# Altium PCB ESP32_AC_Controller.PcbDoc
Units mm, origin at the board's own origin, x right, y up, seen from the top; angles counter-clockwise.
Board outline 70 x 70 mm, 2 copper layers (Top Layer, Bottom Layer); 68 components, 49 nets, 227 pads, 37 vias.
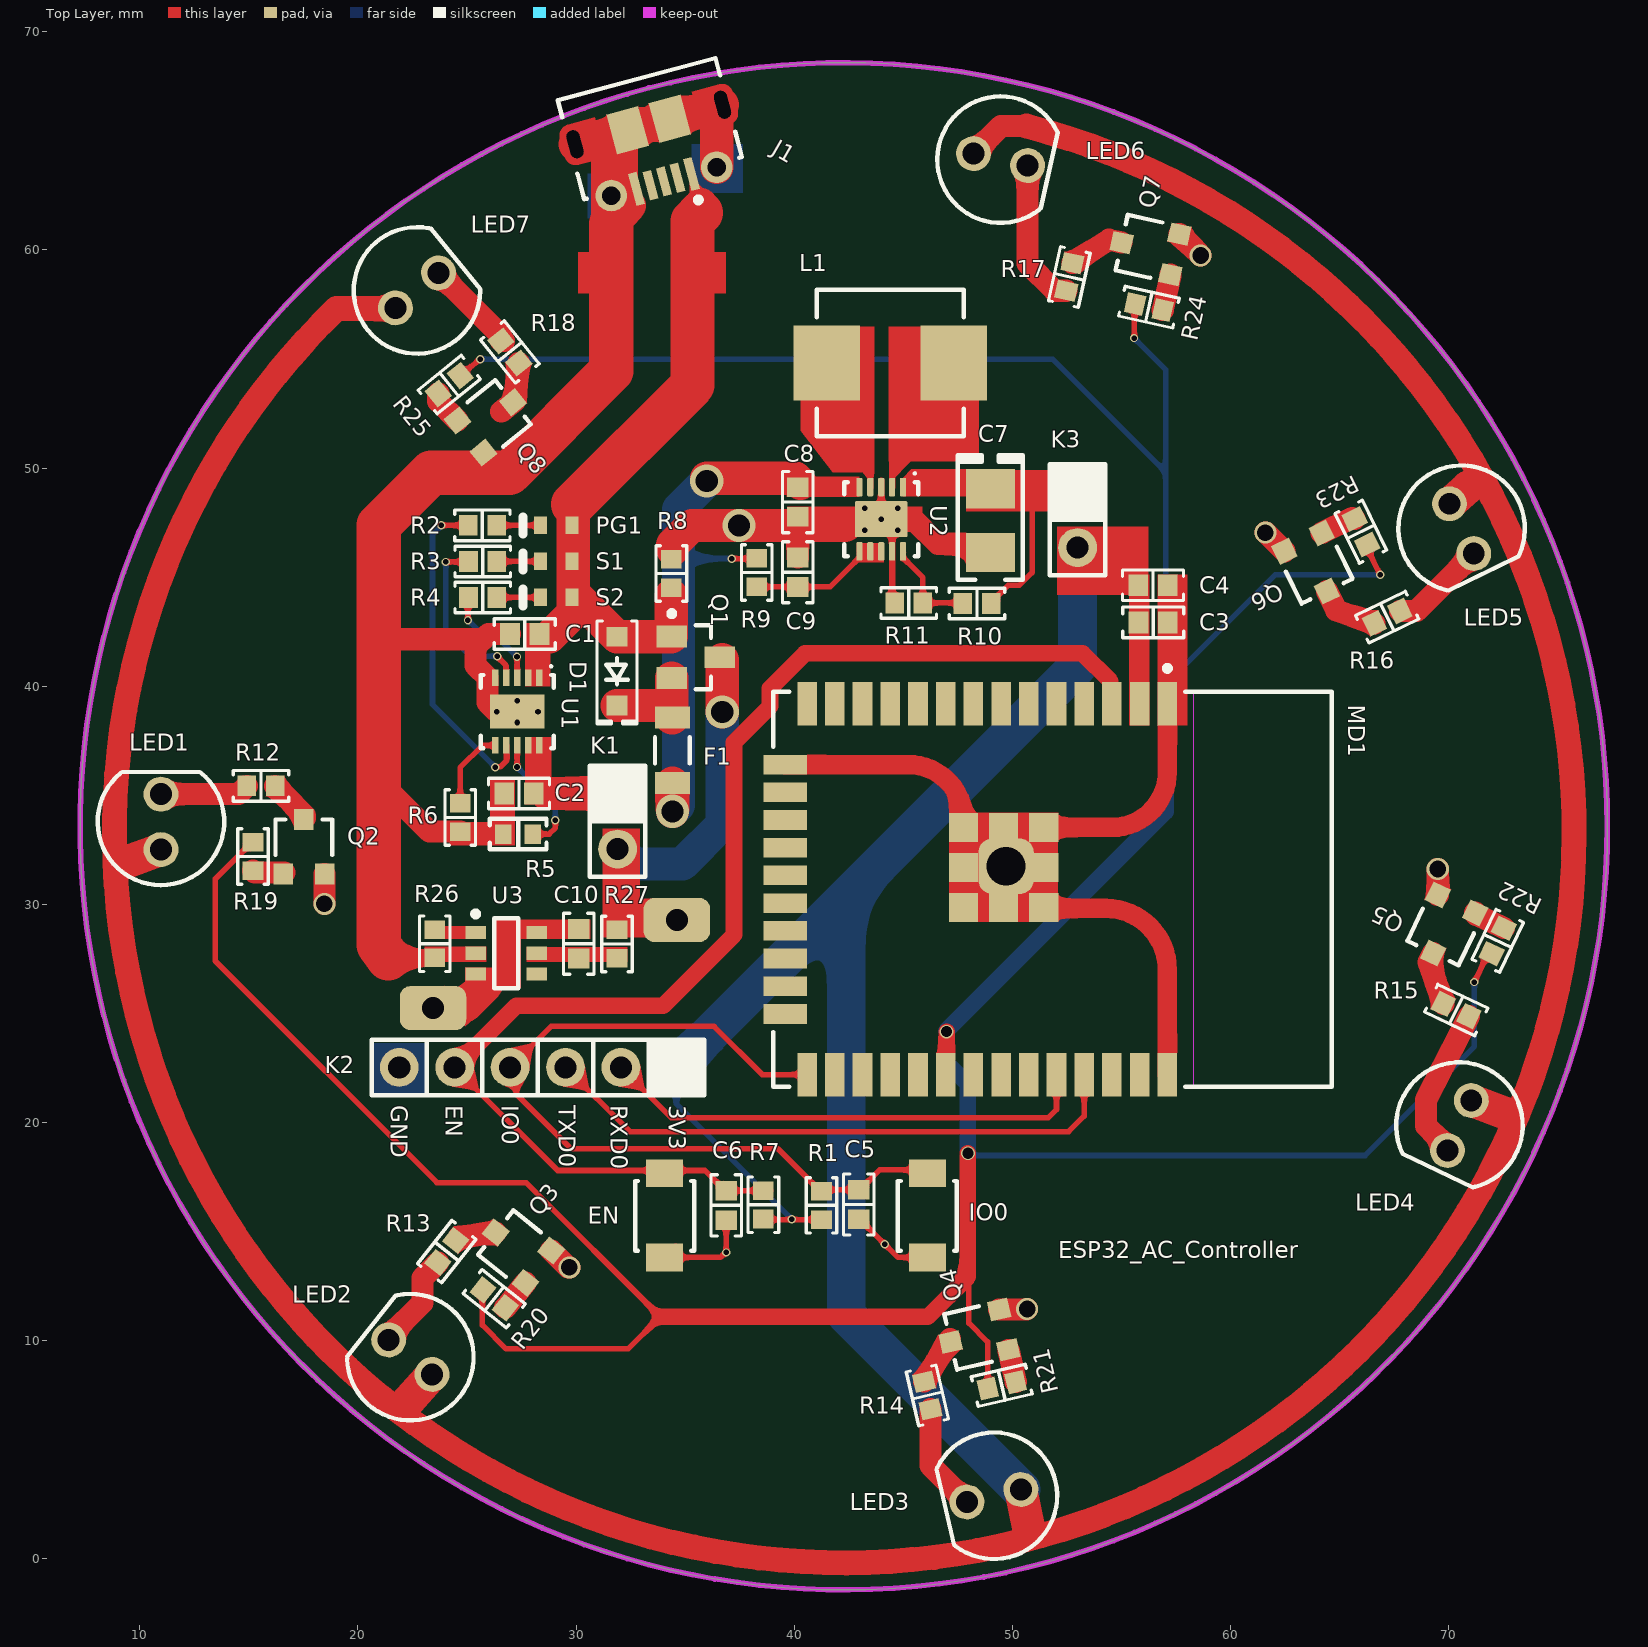
[diagram p0: Top Layer view]
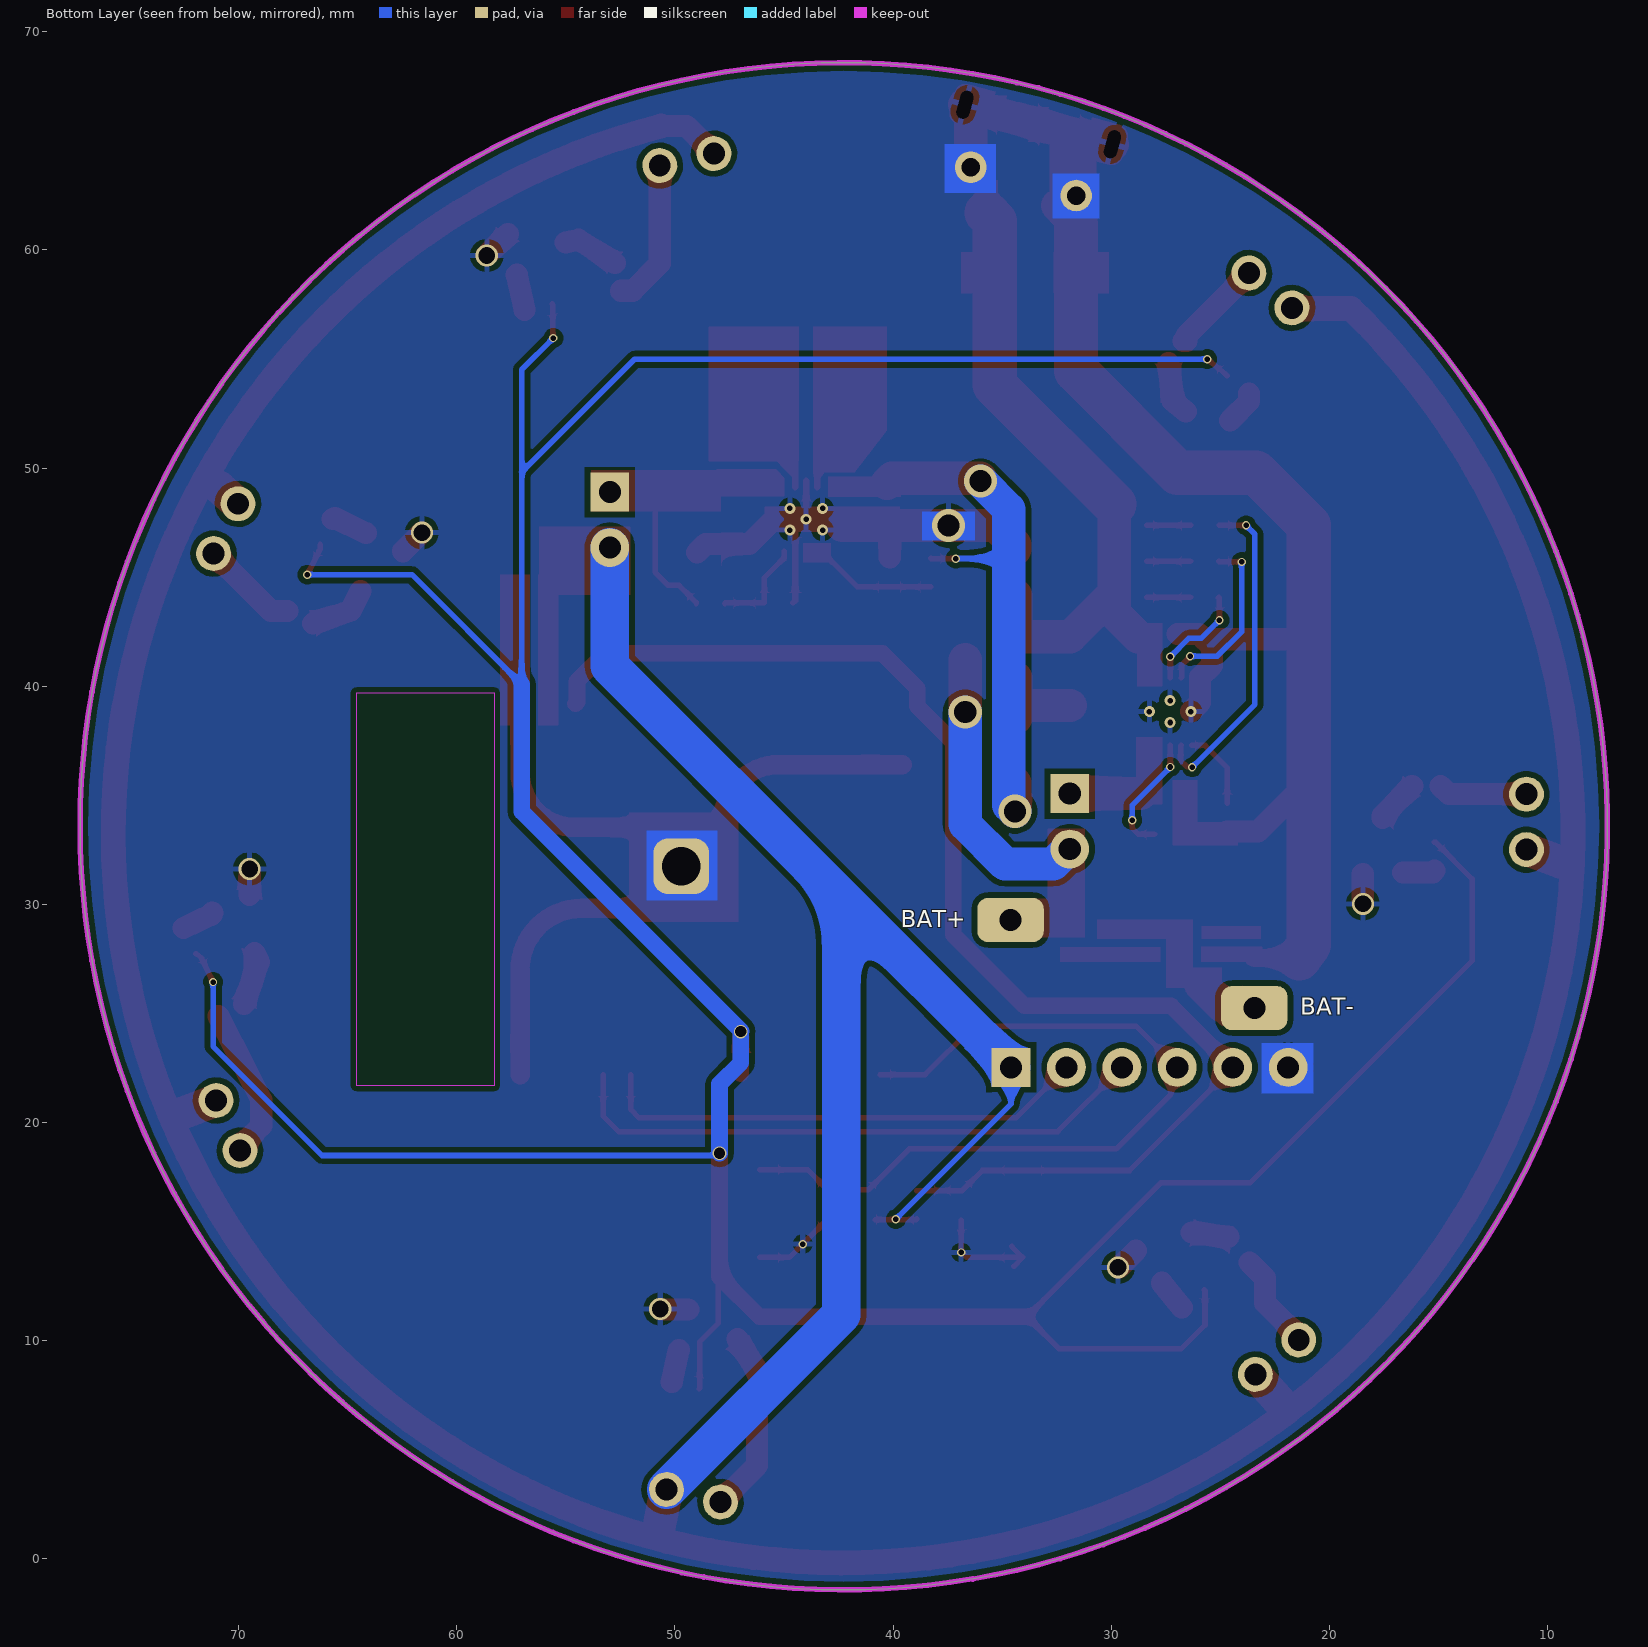
[diagram p1: Bottom Layer view, seen from below]
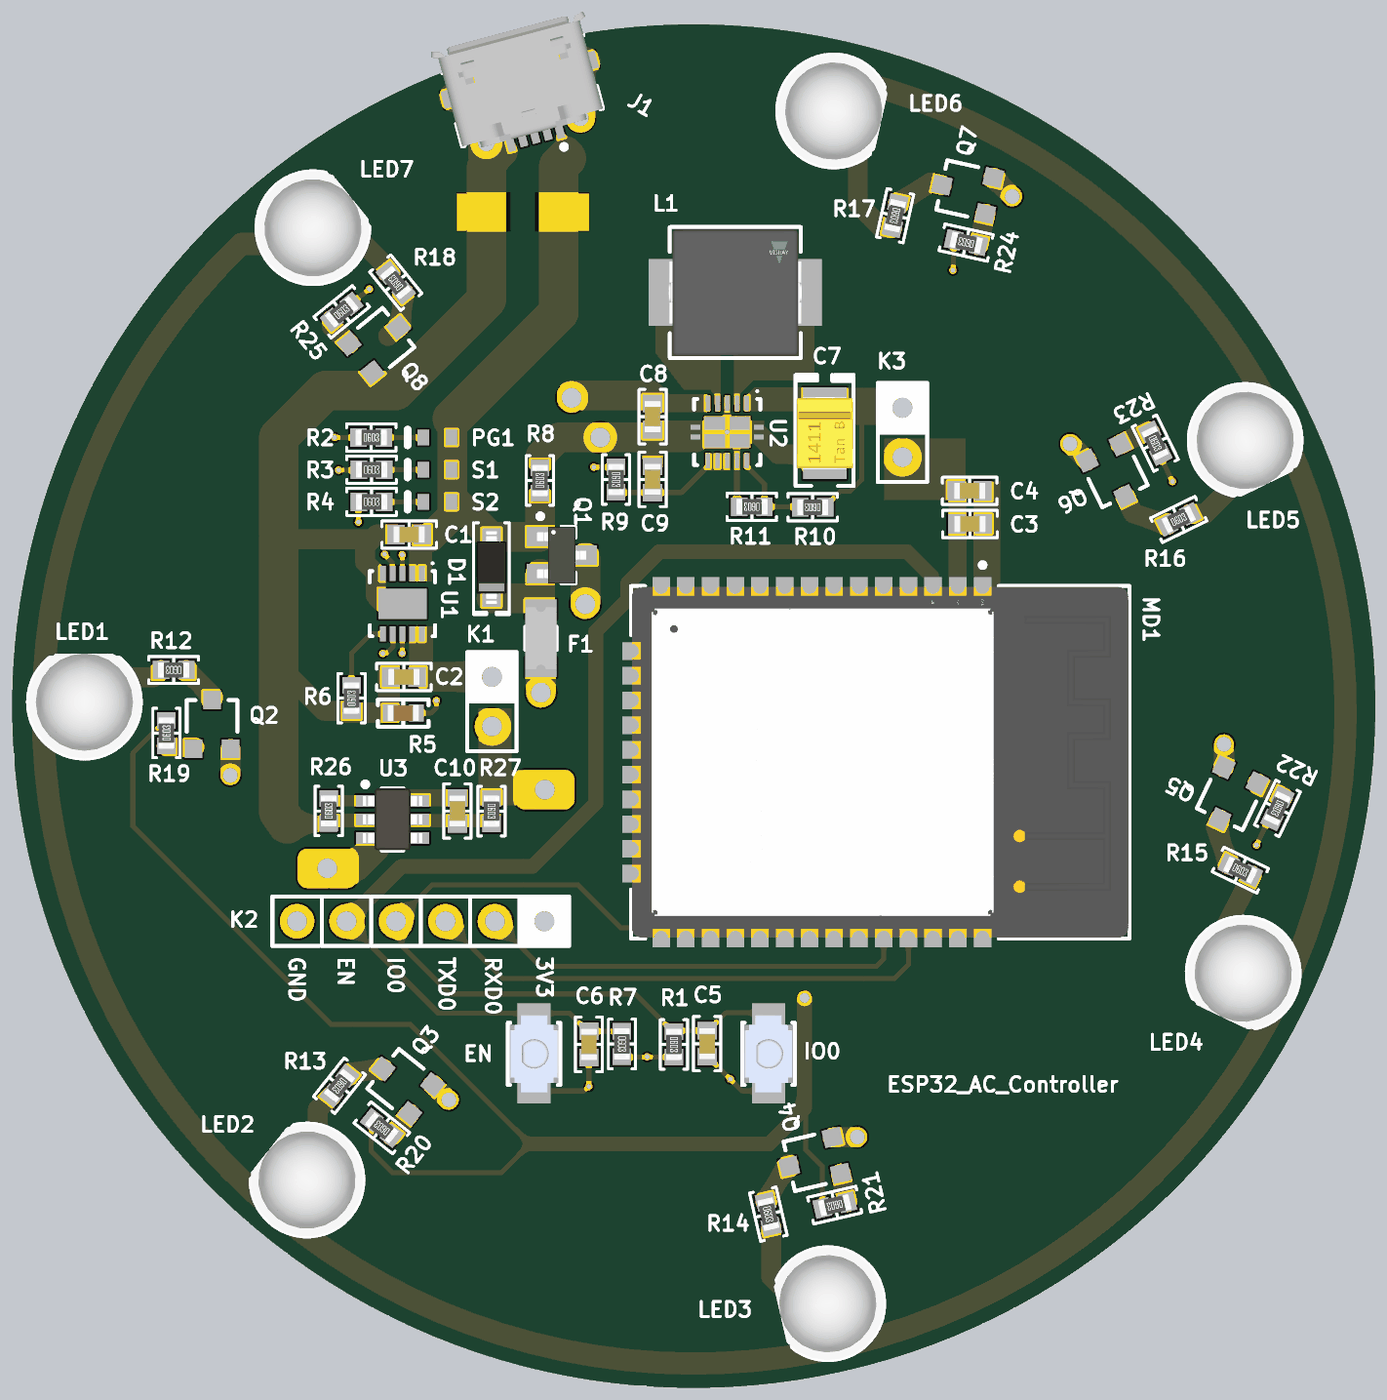
[diagram p2: 3D render of the assembled board from above, using the file's embedded part models]

## Layer stack, top to bottom
Top Solder: solder mask 0.0102, Solder Resist, Dk 3.5
Top Layer: signal copper 0.0356
Dielectric 1: dielectric 0.32, FR-4, Dk 4.8
Bottom Layer: signal copper 0.0356
Bottom Solder: solder mask 0.0102, Solder Resist, Dk 3.5

## Board outline
7.266,33.579 ccw(c42.266,33.579) 42.266,-1.421 ccw(c42.266,33.579) 77.266,33.579 ccw(c42.266,33.579) 42.266,68.579 ccw(c42.266,33.579)

## Design rules (kind name [scope] priority, off if disabled: settings)
Clearance InPolygon [InPolygon] p1: gap=0.254 ignorepadtopadclearanceinfootprint=FALSE
Clearance [All] p2: gap=0.178 ignorepadtopadclearanceinfootprint=FALSE
PolygonConnect [All] p1: connectstyle=Relief reliefconductorwidth=0.254 reliefentries=4 polygonreliefangle="90 Angle" airgapwidth=0.254
RoutingVias [All] p1: holewidth=0.254 width=0.381 viastyle="Through Hole" minholewidth=0.203 minwidth=0.254 maxholewidth=1.524 maxwidth=2.032
SolderMaskExpansion [All] p1: expansion=0.102 istentingtop=FALSE
Width [All] p1: maxlimit=2.032 minlimit=0.254 preferedwidth=0.254
30 further rules are at their usual default settings.

## Components (designator, comment, footprint, x,y, rotation, side; value= is the part's Value field where it differs from the comment)
C1 "4.7µF" "CAP 0603_1608" 27.646,42.393 r0 top
C2 "4.7µF" "CAP 0603_1608" 27.381,35.077 r0 top
C3 "0.1µF" "CAP 0603_1608" 56.45,42.926 r180 top
C4 "10µF" "CAP 0603_1608" 56.439,44.628 r0 top
C5 "0.1µF" "CAP 0603_1608" 42.951,16.245 r270 top
C6 "1µF" "CAP 0603_1608" 36.881,16.205 r90 top
C7 "33µF" "CAP POL 1411_3528" 48.997,47.586 r270 top
C8 "10µF" "CAP 0603_1608" 40.157,48.438 r90 top
C9 "0.1µF" "CAP 0603_1608" 40.157,45.223 r90 top
C10 "0.1µF" "CAP 0603_1608" 30.124,28.194 r270 top
D1 "B5817W" SOD-123 31.877,40.691 r270 top
EN "B3U-1000P" FP-B3U-1000P-MFG 34.061,15.723 r90 top (schematic designator SW2)
F1 "MF-NSMF150-2" BOUR-MF-NSMF150-2_V 34.417,37.059 r270 top
IO0 "B3U-1000P" FP-B3U-1000P-MFG 46.101,15.723 r90 top (schematic designator SW1)
J1 "105017-0001" USB-MICRO-B_V 33.68,64.44 r195 top
K1 "HEADER-1X2" HEADER-1X2 31.902,35.077 r0 top
K2 "HEADER-1X6" HEADER-1X6 34.595,22.53 r270 top
K3 "HEADER-1X2" HEADER-1X2 52.984,48.895 r0 top
L1 "2.2µH" FP-IHLP-2525CZ-FP_2_413x3-MFG 44.399,54.813 r0 top
LED1 "IR LED" "Type 5mm" 10.973,33.782 r90 top
LED2 "IR LED" "Type 5mm" 22.403,9.246 r141.5 top
LED3 "IR LED" "Type 5mm" 49.149,2.896 r193 top
LED4 "IR LED" "Type 5mm" 70.485,19.863 r244.5 top
LED5 "IR LED" "Type 5mm" 70.587,47.219 r296 top
LED6 "IR LED" "Type 5mm" 49.454,64.135 r347.5 top
LED7 "IR LED" "Type 5mm" 22.708,58.141 r39 top
MD1 "ESP32-WROOM-32" FP-ESP32-WROOM-32-MFG 51.839,30.692 r270 top
PG1 "TLMS1100-GS08" VISH-TLMX1100_V 29.097,47.371 r180 top
Q1 "CJ3401" FAIR-SSOT3L-3_V 35.484,41.326 r0 top
Q2 "2N7002" STM-SOT-23-3_V 17.526,32.639 r0 top
Q3 "2N7002" STM-SOT-23-3_V 27.291,14.178 r51.5 top
Q4 "2N7002" STM-SOT-23-3_V 48.386,10.225 r103 top
Q5 "2N7002" STM-SOT-23-3_V 69.814,28.897 r154.5 top
Q6 "2N7002" STM-SOT-23-3_V 63.867,45.478 r206 top
Q7 "2N7002" STM-SOT-23-3_V 56.226,60.063 r77.5 top
Q8 "2N7002" STM-SOT-23-3_V 26.132,52.229 r309 top
R1 "10 kOhms" "RES 0603_1608" 41.25,16.205 r270 top
R2 "1 kOhms" "RES 0603_1608" 25.705,47.371 r0 top
R3 "1 kOhms" "RES 0603_1608" 25.72,45.72 r0 top
R4 "1 kOhms" "RES 0603_1608" 25.72,44.069 r0 top
R5 "10 kOhms" "PTC 0603_1608" 27.345,33.223 r0 top value="470 Ohms"
R6 "1 kOhms" "RES 0603_1608" 24.689,33.985 r90 top
R7 "10 kOhms" "RES 0603_1608" 38.583,16.231 r270 top
R8 "10 kOhms" "RES 0603_1608" 34.366,45.161 r90 top
R9 "100 Ohms" "RES 0603_1608" 38.278,45.212 r270 top
R10 "1 MOhms" "RES 0603_1608" 48.377,43.79 r180 top
R11 "178 kOhms" "RES 0603_1608" 45.248,43.815 r180 top
R12 "62 Ohms" "RES 0603_1608" 15.555,35.433 r180 top
R13 "62 Ohms" "RES 0603_1608" 24.073,14.09 r231.5 top
R14 "62 Ohms" "RES 0603_1608" 46.097,7.492 r283 top
R15 "62 Ohms" "RES 0603_1608" 70.338,25.158 r334.5 top
R16 "62 Ohms" "RES 0603_1608" 67.172,43.162 r26 top
R17 "62 Ohms" "RES 0603_1608" 52.606,58.758 r257.5 top
R18 "62 Ohms" "RES 0603_1608" 26.963,55.32 r129 top
R19 "220 Ohms" "RES 0603_1608" 15.189,32.197 r90 top
R20 "220 Ohms" "RES 0603_1608" 26.246,11.926 r141.5 top
R21 "220 Ohms" "RES 0603_1608" 49.509,7.956 r193 top
R22 "220 Ohms" "RES 0603_1608" 72.245,28.329 r244.5 top
R23 "220 Ohms" "RES 0603_1608" 65.968,47.079 r296 top
R24 "220 Ohms" "RES 0603_1608" 56.255,57.377 r167.5 top
R25 "220 Ohms" "RES 0603_1608" 24.187,53.824 r39 top
R26 "1 kOhms" "RES 0603_1608" 23.52,28.194 r90 top
R27 "100 Ohms" "RES 0603_1608" 31.877,28.184 r270 top
S1 "TLMS1100-GS08" VISH-TLMX1100_V 29.097,45.72 r180 top
S2 "TLMS1100-GS08" VISH-TLMX1100_V 29.097,44.069 r180 top
U1 "MCP73833T-AMI/MF" DFN-MF10 27.305,38.837 r270 top
U2 "TPS63000DRCR" DRC0010J_V 43.985,47.652 r270 top
U3 "DW07D" DW07D 26.797,27.762 r0 top

## Footprints (in the part's own frame and the unit in brackets; to place one, negate y for a bottom-side part, rotate by r counter-clockwise, add the part's x,y. Pads: shape width x height; smd on the part's side, far side on the other; paste and mask are expansions set on the pad)
BOUR-MF-NSMF150-2_V [mm] "SMD, 2-Leads, Body 3.2x1.6mm"
  rect 1x1.6 smd: 1(-1.5,0) 2(1.5,0)
  silkscreen extent -0.6,-0.8 0.6,0.8, body extent -1.6,-0.8 1.6,0.8, height 0.55
"CAP 0603_1608" [mm] "Chip Capacitor, 2-Leads, Body 1.60x0.80mm, IPC Medium Density"
  rect 0.9x1 smd: 1(-0.675,0) 2(0.675,0)
  silkscreen extent -1.4,-0.7 1.4,0.7, body extent -0.8,-0.41 0.8,0.41, height 0.82
"CAP POL 1411_3528" [mm] "Molded Capacitor, 2-Leads, Body 3.50x2.80mm, IPC Medium Density"
  rect 1.8x2.23 smd: 1(-1.46,0) 2(1.46,0)
  silkscreen extent -3,-1.5 2.71,1.48, body extent -1.87,-1.45 1.86,1.45, height 2
DFN-MF10 [mm] "SON, 10-Leads, Body 3x3mm, Pitch 0.5mm, Microchip Recommended"
  rect 0.762x0.3 smd: 1(-1.55,1) 2(-1.55,0.5) 3(-1.55,0) 4(-1.55,-0.5) 5(-1.55,-1) 6(1.55,-1) 7(1.55,-0.5) 8(1.55,0) 9(1.55,0.5) 10(1.55,1)
  rect 1.55x2.48 smd: 11(0,0)
  silkscreen extent -2.12,-1.68 1.67,1.68, body extent -1.52,-1.52 1.52,1.52, height 1
DRC0010J_V [mm] "SON, 10-Leads, Body 3x3mm, Pitch 0.5mm, Thermal Pad 2.4x1.65mm, TI Recommended"
  rrect36% 0.85x0.28 smd paste-0.025 mask+0.07: 1(-1.475,1) 2(-1.475,0.5) 3(-1.475,0) 4(-1.475,-0.5) 5(-1.475,-1) 6(1.475,-1) 7(1.475,-0.5) 8(1.475,0) 9(1.475,0.5) 10(1.475,1)
  rrect6% 1.65x2.4 smd paste-0.825 mask+0.07: 11(0,0)
  Top Layer region: -0.39,1.2 -0.11,1.2 -0.11,1.9 -0.39,1.9
  Top Layer region: 0.39,1.9 0.11,1.9 0.11,1.2 0.39,1.2
  Top Layer region: 0.39,-1.2 0.11,-1.2 0.11,-1.9 0.39,-1.9
  Top Layer region: -0.39,-1.9 -0.11,-1.9 -0.11,-1.2 -0.39,-1.2
  silkscreen extent -2.15,-1.7 1.7,1.7, body extent -1.55,-1.55 1.55,1.55, height 1
DW07D [mm] "SOT23, 6-Leads, Body 2.92x2.80mm, Pitch 0.95mm, IPC Medium Density"
  rect 0.95x0.6 smd: 1(-1.4,0.95) 2(-1.4,0) 3(-1.4,-0.95) 4(1.4,-0.95) 5(1.4,0) 6(1.4,0.95)
  silkscreen extent -1.52,-1.6 0.55,1.92, body extent -1.53,-1.59 1.53,1.59, height 1.35
FAIR-SSOT3L-3_V [mm] "SOT23, 3-Leads, Body 2.92x1.4mm, Pitch 0.95mm"
  rect 1.4x1 smd: 1(-1.1,0.95) 2(-1.1,-0.95) 3(1.1,0)
  silkscreen extent -1.22,-1.46 0.7,2.12, body extent -1.26,-1.46 1.26,1.46, height 1.12
FP-B3U-1000P-MFG [mm]
  rect 1.27x1.7 smd paste+0 mask+0: 1(-1.905,0) 2(1.956,0)
  silkscreen extent -1.6,-1.35 1.6,1.35, body extent -2.2,-1.45 2.2,1.45, height 0.25
FP-ESP32-WROOM-32-MFG [mm]
  rect 2x0.9 smd paste+0 mask+0: 1(-8.5,5.26) 2(-8.5,3.99) 3(-8.5,2.72) 4(-8.5,1.45) 5(-8.5,0.18) 6(-8.5,-1.09) 7(-8.5,-2.36) 8(-8.5,-3.63) 9(-8.5,-4.9) 10(-8.5,-6.17) 11(-8.5,-7.44) 12(-8.5,-8.71) 13(-8.5,-9.98) 14(-8.5,-11.25) 25(8.5,-11.25) 26(8.5,-9.98) 27(8.5,-8.71) 28(8.5,-7.44) 29(8.5,-6.17) 30(8.5,-4.9) 31(8.5,-3.63) 32(8.5,-2.36) 33(8.5,-1.09) 34(8.5,0.18) 35(8.5,1.45) 36(8.5,2.72) 37(8.5,3.99) 38(8.5,5.26)
  rect 0.9x2 smd paste+0 mask+0: 15(-5.715,-12.25) 16(-4.445,-12.25) 17(-3.175,-12.25) 18(-1.905,-12.25) 19(-0.635,-12.25) 20(0.635,-12.25) 21(1.905,-12.25) 22(3.175,-12.25) 23(4.445,-12.25) 24(5.715,-12.25)
  rect 1.33x1.33 smd paste+0 mask+0: 39(-2.835,-0.405) 39(-2.835,-2.24) 39(-2.835,-4.075) 39(-1,-0.405) 39(-1,-2.24) 39(-1,-4.075) 39(0.835,-0.405) 39(0.835,-2.24) 39(0.835,-4.075)
  Keep-Out Layer region: -9,6.45 9,6.45 9,12.75 -9,12.75
  Keep-Out Layer region: -9,6.45 9,6.45 9,12.75 -9,12.75
  silkscreen extent -10.25,-12.8 9.05,12.8, body extent -9.6,-13.35 9.6,12.9, height 0.25
FP-IHLP-2525CZ-FP_2_413x3-MFG [mil]
  rect 120x135 smd paste+0 mask+0: 1(-115,0) 2(115,0)
  silkscreen extent -132,-132 132,132, body extent -166,-136 166,136, height 10
HEADER-1X2 [mil]
  rect 70x70 hole 40: 1(0,0)
  round 70 hole 40: 2(0,-100)
  silkscreen extent -50,-150 50,50, body extent -50,-150 50,50, height 470
HEADER-1X6 [mil]
  rect 70x70 hole 40: 1(0,0)
  round 70 hole 40: 2(0,-100) 3(0,-200) 4(0,-300) 5(0,-400) 6(0,-500)
  silkscreen extent -50,-550 50,50, body extent -50,-550 50,50, height 470
"PTC 0603_1608" [mil] "Chip Thermistor, 2-Leads, Body 1.60x0.80mm, IPC Medium Density"
  rect 30x35 smd: 1(-26.57,0) 2(26.57,0)
  silkscreen extent -51,-28 51,28, body extent -31,-16 32,16, height 32
"RES 0603_1608" [mm] "Chip Resistor, 2-Leads, Body 1.60x0.80mm, IPC Medium Density"
  rect 0.85x0.95 smd: 1(-0.65,0) 2(0.65,0)
  silkscreen extent -1.27,-0.7 1.27,0.7, body extent -0.8,-0.4 0.8,0.4, height 0.45
SOD-123 [mm] "SOD, 2-Leads, Body 1.55x3.70mm, IPC Medium Density"
  rect 0.9x0.95 smd: 1(-1.575,0) 2(1.575,0)
  silkscreen extent -2.3,-0.92 2.41,0.92, body extent -1.86,-0.78 1.86,0.77, height 1.35
STM-SOT-23-3_V [mm] "SOT23, 3-Leads, Body 3.016x2.8mm, Pitch 0.95mm"
  rect 0.9x0.95 smd: 1(-0.95,-1.25) 2(0.95,-1.25) 3(0,1.25)
  silkscreen extent -1.3,-0.38 1.3,1.25, body extent -1.14,-1.25 1.17,1.36, height 1.25
"Type 5mm" [mm] "THT, LED-5mm, 2pin- Body 5.8mm"
  round 1.6 hole 1: 1(1.27,0) 2(-1.27,0)
  silkscreen extent -2.9,-2.9 2.29,2.9, body extent -2.9,-2.9 2.5,2.9, height 11.7
USB-MICRO-B_V [mm] "USB, MICRO B, Body 7.491x4.695 mm, Pitch 0.65 mm"
  rect 0.4x1.524 smd: 1(-1.3,1.35) 5(1.3,1.35)
  rect 0.4x1.35 smd: 2(-0.65,1.35) 3(0,1.35) 4(0.65,1.35)
  round 1.45 hole 0.85: 6(-2.5,1.35) 7(2.5,1.35)
  rrect50% 0x0 hole 0.6 slot 1.3 at 90 deg: 8(-3.5,-1.35) 11(3.5,-1.35)
  rect 1.5x1.9 smd: 9(-1,-1.35) 10(1,-1.35)
  Top Layer circle w0.5: c-3.6,-1.8 r0.25
  Top Layer circle w0.5: c-3.6,-0.9 r0.25
  Top Layer circle w0.5: c3.6,-1.8 r0.25
  Top Layer circle w0.5: c3.6,-0.9 r0.25
  Top Layer region: -3.6,-1.8 -3.6,-0.9 -4.1,-0.9 -4.1,-1.8
  Top Layer region: 3.6,-0.9 3.6,-1.8 4.1,-1.8 4.1,-0.9
  Top Layer region: 2.3,-0.4 2.3,-2.3 3.6,-2.3 3.6,-0.4
  Top Layer region: -2.3,-2.3 -2.3,-0.4 -3.6,-0.4 -3.6,-2.3
  silkscreen extent -3.75,-3.5 3.75,2.7, body extent -4.1,-3.9 4.1,1.5, height 2.67
VISH-TLMX1100_V [mm] "SMD, 2-Leads, Body 1.6x0.8mm"
  rect 0.6x0.8 smd: 1(-0.725,0) 2(0.725,0)
  silkscreen extent 1.53,-0.4 1.53,0.4, body extent -0.8,-0.4 0.8,0.4, height 0.65

## Part data
C1 C2: library part C0603C105K4RACAUTO, "CAP CER 0603 1UF 16V X7R 10%", Capacitance=1µF, Device Package="0603 (1608 Metric)", Manufacturer=KEMET, Operating Temperature="-55°C ~ 125°C", Ratings=AEC-Q200, Supplier Part Number 1=399-17704-1-ND, Temperature Coefficient=X7R, Tolerance=±10%, Voltage - Rated=16V, Applications="Automotive, Bypass, Decoupling", ComponentLink1Description=Datasheet, ComponentLink1URL=https://api.kemet.com/component-edge/download/datasheet/C0603C105K4RACAUTO.pdf, ComponentLink2Description="DigiKey Link", ComponentLink2URL=http://digikey.com/product-detail/en/kemet/C0603C105K4RACAUTO/399-17704-1-ND/8635855, LastUpdated="2020/9/2 1:03:36", Lifecycle Status=Active, Minimum Order=1, Mounting Type="Surface Mount, MLCC", Package / Case="0603 (1608 Metric)", Packaging=TapeAndReel, Part Number=C0603C105K4RACAUTO, Part Status=Active, PartId=2179, Price=0.02, Series="SMD Auto X7R", Size / Dimension="0.063\" L x 0.031\" W (1.60mm x 0.80mm)", Supplier 1=DigiKey, Thickness (Max)="0.037\" (0.95mm)"
C3 C5 C10: library part C0603T104K8RAC7867, "CAP CER 0.1UF 10V X7R 0603", Device Package="0603 (1608 Metric)", Manufacturer=KEMET, Operating Temperature="-55°C ~ 125°C", Ratings=COTS, Supplier Part Number 1=399-20424-1-ND, Temperature Coefficient=X7R, Tolerance=±10%, Voltage - Rated=10V, Applications="High Reliability, Bypass, Decoupling", Capacitance=0.1µF, ComponentLink1Description=Datasheet, ComponentLink1URL=https://api.kemet.com/component-edge/download/datasheet/C0603T104K8RAC7867.pdf, ComponentLink2Description="DigiKey Link", ComponentLink2URL=http://digikey.com/product-detail/en/kemet/C0603T104K8RAC7867/399-20424-1-ND/9925028, LastUpdated="2020/9/2 1:03:35", Lifecycle Status=Active, Minimum Order=1, Mounting Type="Surface Mount, MLCC", Package / Case="0603 (1608 Metric)", Packaging=TapeAndReel, Part Number=C0603T104K8RAC7867, Part Status=Active, PartId=2528, Price=0.23, Series="SMD COTS X7R", Size / Dimension="0.063\" L x 0.031\" W (1.60mm x 0.80mm)", Supplier 1=DigiKey, Thickness (Max)="0.034\" (0.87mm)"
C4: library part GRM188R61A106MAALD, "CAP CER 10UF 10V X5R 0603", Device Package="0603 (1608 Metric)", Manufacturer="Murata Electronics", Operating Temperature="-55°C ~ 85°C", Supplier Part Number 1=490-12734-1-ND, Temperature Coefficient=X5R, Tolerance=±20%, Voltage - Rated=10V, Applications="General Purpose", Capacitance=10µF, ComponentLink1Description=Datasheet, ComponentLink1URL=https://search.murata.co.jp/Ceramy/image/img/A01X/G101/ENG/GRM188R61A106MAAL-01.pdf, ComponentLink2Description="DigiKey Link", ComponentLink2URL=http://digikey.com/product-detail/en/murata-electronics/GRM188R61A106MAALD/490-12734-1-ND/5797703, LastUpdated="2020/9/2 1:03:35", Lifecycle Status=Active, Minimum Order=1, Mounting Type="Surface Mount, MLCC", Package / Case="0603 (1608 Metric)", Packaging=TapeAndReel, Part Number=GRM188R61A106MAALD, Part Status=Active, PartId=2423, Price=0.08, Series=GRM, Size / Dimension="0.063\" L x 0.031\" W (1.60mm x 0.80mm)", Supplier 1=DigiKey, Thickness (Max)="0.037\" (0.95mm)"
C6: library part CC0603KRX7R6BB105, "CAP CER 1UF 10V X7R 0603", Device Package="0603 (1608 Metric)", Manufacturer=Yageo, Operating Temperature="-55°C ~ 125°C", Supplier Part Number 1=311-1796-1-ND, Temperature Coefficient=X7R, Tolerance=±10%, Voltage - Rated=10V, Applications="General Purpose", Capacitance=1µF, ComponentLink1Description=Datasheet, ComponentLink1URL=https://www.yageo.com/upload/media/product/productsearch/datasheet/mlcc/UPY-GPHC_X7R_6.3V-to-50V_18.pdf, ComponentLink2Description="DigiKey Link", ComponentLink2URL=http://digikey.com/product-detail/en/yageo/CC0603KRX7R6BB105/311-1796-1-ND/5195698, LastUpdated="2020/9/2 1:03:36", Lifecycle Status=Active, Minimum Order=1, Mounting Type="Surface Mount, MLCC", Package / Case="0603 (1608 Metric)", Packaging=TapeAndReel, Part Number=CC0603KRX7R6BB105, Part Status=Active, PartId=2290, Price=0.02, Series=CC, Size / Dimension="0.063\" L x 0.031\" W (1.60mm x 0.80mm)", Supplier 1=DigiKey, Thickness (Max)="0.035\" (0.90mm)"
C7: library part CWR11MH105KB, "CAP TANT 1UF 10% 35V 1411", Capacitance=1µF, Device Package="1411 (3528 Metric)", ESR (Equivalent Series Resistance)=6.5Ohm, Manufacturer=KEMET, Manufacturer Size Code=B, Operating Temperature="-55°C ~ 125°C", Supplier Part Number 1=1001-2230-1-ND, Tolerance=±10%, Voltage - Rated=35V, ComponentLink1Description=Datasheet, ComponentLink1URL=https://api.kemet.com/component-edge/download/datasheet/CWR11MH105KB.pdf, ComponentLink2Description="DigiKey Link", ComponentLink2URL=http://digikey.com/product-detail/en/kemet/CWR11MH105KB/1001-2230-1-ND/3317720, Failure Rate="B (0.1%)", Features="High Reliability", Height - Seated (Max)="0.083\" (2.10mm)", LastUpdated="2020/9/2 1:15:46", Lifecycle Status=Active, Minimum Order=1, Mounting Type="Surface Mount", Package / Case="1411 (3528 Metric)", Packaging=TapeAndReel, Part Number=CWR11MH105KB, Part Status=Active, PartId=1, Price=1.20, Series="Military, MIL-PRF-55365/8, CWR11", Size / Dimension="0.138\" L x 0.110\" W (3.50mm x 2.80mm)", Supplier 1=DigiKey, Type=Molded
C8: library part GRM188R60J106ME47D, "CAP CER 10UF 6.3V X5R 0603", Device Package="0603 (1608 Metric)", Manufacturer="Murata Electronics", Operating Temperature="-55°C ~ 85°C", Supplier Part Number 1=490-3896-1-ND, Temperature Coefficient=X5R, Tolerance=±20%, Voltage - Rated=6.3V, Applications="General Purpose", Capacitance=10µF, ComponentLink1Description=Datasheet, ComponentLink1URL=https://www.murata.com/~/media/webrenewal/support/library/catalog/products/capacitor/mlcc/c02e.ashx?la=en-us, ComponentLink2Description="DigiKey Link", ComponentLink2URL=http://digikey.com/product-detail/en/murata-electronics/GRM188R60J106ME47D/490-3896-1-ND/965938, LastUpdated="2020/9/2 1:03:35", Lifecycle Status=Active, Minimum Order=1, Mounting Type="Surface Mount, MLCC", Package / Case="0603 (1608 Metric)", Packaging=TapeAndReel, Part Number=GRM188R60J106ME47D, Part Status=Active, PartId=2351, Price=0.03, Series=GRM, Size / Dimension="0.063\" L x 0.031\" W (1.60mm x 0.80mm)", Supplier 1=DigiKey, Thickness (Max)="0.035\" (0.90mm)"
C9: library part GRM188R60J106ME47D, "CAP CER 10UF 6.3V X5R 0603", Capacitance=10µF, Device Package="0603 (1608 Metric)", Manufacturer="Murata Electronics", Operating Temperature="-55°C ~ 85°C", Supplier Part Number 1=490-3896-1-ND, Temperature Coefficient=X5R, Tolerance=±20%, Voltage - Rated=6.3V, Applications="General Purpose", ComponentLink1Description=Datasheet, ComponentLink1URL=https://www.murata.com/~/media/webrenewal/support/library/catalog/products/capacitor/mlcc/c02e.ashx?la=en-us, ComponentLink2Description="DigiKey Link", ComponentLink2URL=http://digikey.com/product-detail/en/murata-electronics/GRM188R60J106ME47D/490-3896-1-ND/965938, LastUpdated="2020/9/2 1:03:35", Lifecycle Status=Active, Minimum Order=1, Mounting Type="Surface Mount, MLCC", Package / Case="0603 (1608 Metric)", Packaging=TapeAndReel, Part Number=GRM188R60J106ME47D, Part Status=Active, PartId=2351, Price=0.03, Series=GRM, Size / Dimension="0.063\" L x 0.031\" W (1.60mm x 0.80mm)", Supplier 1=DigiKey, Thickness (Max)="0.035\" (0.90mm)"
D1: library part B5818W-TP, "DIODE SCHOTTKY 30V 1A SOD-123", Capacitance @ Vr, F="120pF @ 4V, 1MHz", Current - Average Rectified (Io)=1A, Current - Reverse Leakage @ Vr="1mA @ 30V", Manufacturer="Micro Commercial Co", Operating Temperature - Junction="-65°C ~ 125°C", Package / Case=SOD-123, Supplier Part Number 1=B5818W-TPMSCT-ND, Voltage - DC Reverse (Vr) (Max)=30V, Voltage - Forward (Vf) (Max) @ If="550mV @ 1A", ComponentLink1Description=Datasheet, ComponentLink1URL=https://www.mccsemi.com/pdf/Products/B5817W-B5819W(SOD-123).pdf, ComponentLink2Description="DigiKey Link", ComponentLink2URL=http://digikey.com/product-detail/en/micro-commercial-co/B5818W-TP/B5818W-TPMSCT-ND/10054446, Diode Type=Schottky, LastUpdated="2020/9/2 1:19:07", Lifecycle Status=Active, Minimum Order=1, Mounting Type="Surface Mount", Packaging=TapeAndReel, Part Number=B5818W-TP, Part Status=Active, PartId=2247, Price=0.08, Series=-, Speed="Fast Recovery =< 500ns, > 200mA (Io)", Supplier 1=DigiKey, Supplier Device Package=SOD-123
EN IO0: library part CMP-2100-03586-2, "SWITCH TACTILE SPST-NO 0.05A 12V", Contact Current Rating=50mA, Contact Resistance=100mR, Insulation Resistance=100MR, Max Operating Temperature=70°C, Max Voltage Rating (DC)=12V, Min Operating Temperature=-25°C, Operating Force=1.5N, Package Quantity=1, Ratings="Dust Proof", Actuator Length=0.4mm, Actuator Type=Standard, Contact Material=Silver, Current Rating=50mA, Depth=2.5mm, Electrical Life=200000Cycles, Height=1.2mm, Illumination Type=Non-Illuminated, Lead Free="Lead Free", Length=4mm, Max Current Rating=50mA, Mechanical Life=200000Cycles, Mount="Surface Mount", Orientation=Straight, Packaging="Tape and Reel", Switch Function=Off-Mom, Switch Travel=0.15mm, Termination=SMD/SMT, Throw Configuration=SPST, Voltage Rating (DC)=12V, Weight=0.000776oz, Width=3mm
F1: library part CMP-2000-06693-1, "PTC Resettable Fuse, 6 V, 100 A, -40 to 85 degC, 2-Pin SMD, RoHS, Tape and Reel", Current Rating=100A, Hold Current=1.5A, Manufacturer=Bourns, Maximum Voltage=6VDC, Maximum Voltage DC=6V, Operating Temperature Range=-40Cto+85C, Package / Case=1206(3216metric), Package Description="2-Pin Surface Mount Device, Body 3.2 x 1.6 mm", Resistance=130mOhms, Trip Current=3A, Brand=Bourns, Current Rating (Max)=100A, Current Rating - Max=100A, Datasheet URL=http://www.bourns.com/docs/Product-Datasheets/mfnsmf.pdf, Datasheet Version="Rev. T, 08/2015", Dimensions=3.4mmLx1.8mmWx0.7mmH, Factory Pack Quantity=3000, Manufacturer URL=http://www.bourns.com/, Mounting Style=SMD/SMT, Mounting Technology=SurfaceMount, Package Reference=MF-NSMF150-2, Packaging=Reel, Product Category=ResettableFuses-PPTC, RoHS=Details, Series=MF-NSMF, Termination Style=SMD/SMT, Tradename=Multifuse, Type=PTCResettableFuses
J1: library part CMP-2000-05827-1, "Micro-USB B Receptacle, Right Angle, Bottom Mount, Surface Mount, with Solder Tabs, -30 to 85 degC, 5-Pin USB, RoHS, Tape and Reel", Manufacturer=Molex, Package Description="5-Leads USB, Micro B, Body 7.5 x 5 mm, Pitch 0.65 mm", Package Reference=MICRO-B, Package Version="Rev. F, 12/2012", Standard Package=1, Voltage - Max=30V, 3D Model=105017-0001.stp, Catalog Drawings=1050170001, Category=Connectors,Interconnects, Circuits=5, Connector Type=USB-microB, Datasheet URL=http://www.molex.com/elqNow/elqRedir.htm?ref=http://www.molex.com/webdocs/datasheets/pdf/en-us/1050170001_IO_CONNECTORS.pdf, Datasheet Version=03/2016, Family=USB,DVI,HDMIConnectors, Featured Product=Micro-USBConnectorsUSBConnectors, Features=Shielded,SolderRetention, Gender=Receptacle, Ingress Protection=-, Manufacturer URL=http://www.molex.com/, Mating Products=WM17145-ND-CABLEMICROUSBBTOSTDA1.0MWM17147-ND-CABLEMICROUSBBTOSTDA2.0MWM17146-ND-CABLEMICROUSBBTOSTDA1.5M, Mounting Technology=SurfaceMount, Mounting Type=BoardCutout,SurfaceMount,RightAngle, Number of Contacts=5, Online Catalog=Molex-MicroUSB, Other Names=WM1399DKR, Package URL=http://www.molex.com/pdm_docs/sd/1050170001_sd.pdf, Packaging=Digi-Reel®, PCN Assembly/Origin=ResinSupplier21/Oct/2015, RoHS Information=1050170001CertofCompliance, Series=-, Specifications=-
K1 K2 K3: Supplier Part Number 1=S1011E-36-ND, Supplier 1=Digi-Key
  K1 K3: REEL=TH
L1: library part CMP-02424-000104-1, "Commercial Inductors, High Saturation Series 6.8uH 4.5A 60mΩ 20%", Case Code (Imperial)=2525, Case Code (Metric)=6363, Current Rating=4.5A, DC Resistance (DCR)=60mR, Inductance=6.8uH, Inductance Tolerance=20%, Max DC Current=8A, Max Operating Temperature=125°C, Min Operating Temperature=-55°C, Package Quantity=2000, Self Resonant Frequency=5MHz, Test Frequency=100kHz, Case/Package=2525, Contact Plating=Tin, Core Material=Metal, Depth=6.72mm, Height=3mm, Height - Seated (Max)=0.118inch, Lead Free="Lead Free", Length=7.24mm, Military Standard=Not, Mount="Surface Mount", Number of Pins=2, Packaging="Tape and Reel", Radiation Hardening=No, RMS Current (Irms)=4.5A, Saturation Current=8A, Shielding=Shielded, Termination=SMD/SMT, Tolerance=20%, Width=0.255inch
LED1 LED2 LED3 LED4 LED5 LED6 LED7: library part CMP-1489-00006-1, "THT LED round mono-color waterclear, WL-TMRW ,Blue", Emitting color=Blue, Manufacturer="Wuerth Elektronik", PartNumber=151053BS04500, ComponentLink1Description="Manufacturer URL", ComponentLink1URL=http://www.we-online.com, ComponentLink2Description=Datasheet, ComponentLink2URL=http://katalog.we-online.de/pbs/datasheet/7448042001.pdfhttp://katalog.we-online.de/pbs/datasheet/7448042001.pdfhttp://katalog.we-online.de/pbs/datasheet/7448042001.pdfhttp://katalog.we-online.de/pbs/datasheet/151053BS04500.pdf, PackageReference="Type 5mm"
MD1: library part CMP-194065-000008-1, "RX TXRX MOD WIFI SURFACE MOUNT", Case/Package=SMD/SMT, Frequency=2.5GHz, Max Operating Temperature=85°C, Min Operating Temperature=-40°C, Operating Supply Voltage=3.6V, Package Quantity=550, Data Rate=150Mbps, Mount="Surface Mount", Packaging="Cut Tape", Sensitivity=-98dBm, Weight=0.088185oz
PG1 S1 S2: library part CMP-1666-00027-1, "LED, RED, 2.1 V, -40 to 100 degC, 2-Pin SMD (0603), RoHS, Tape and Reel", Capacitance="12 pF", Case Code (Imperial)=0603, Case Code (Metric)=1608, Max Operating Temperature=125degC, Min Operating Temperature=-55degC, Package Quantity=4000, Resistance="100000000000 Ohm", Tolerance=5%, Type (Capacitors)=C0G, Voltage Rating="50 V", Case/Package=0603, ComponentLink1Description="Manufacturer URL", ComponentLink1URL=http://www.vishay.com/, ComponentLink2Description=Datasheet, ComponentLink2URL=http://www.vishay.com/docs/83173/tlmb1100.pdf, DatasheetVersion="Rev. 2.7, 03/2016", Height="0.8 mm", Length="1.6 mm", Mount="Surface Mount", PackageDescription="2-Pin Surface Mount Device, Body 1.6 x 0.8 mm", PackageReference=TLMX1100, Packaging="Tape and Reel", Pins=2, Radiation Hardening=No, REACH SVHC="No SVHC", RoHSCompliant=True, Voltage Rating (DC)="50 V", Width="0.8 mm"
Q1: library part CMP-2000-06247-1, "P-Channel Specified Power Trench(R) MOSFET, 1.8 V, -55 to 150 degC, 3-Pin SSOT, RoHS, Tape and Reel", Continuous Drain Current Id=2.4A, Current Temperature=25°C, Drain Source Voltage Vds=20V, Manufacturer="Fairchild Semiconductor", On Resistance Rds(on)=52mohm, Operating Temperature Max=150°C, Operating Temperature Min=-55°C, Operating Temperature Range=-55°Cto+150°C, Package / Case=SOT-23, Package Description="3-Pin Small Outline Transistor, Body 2.92 x 1.4 mm, Pitch 0.95 mm", Package Reference=SSOT3L, Package Version="Rev. 3, 05/2015", Power Dissipation Pd=500mW, Pulse Current Idm=10A, Rds(on) Test Voltage Vgs=-4.5V, Threshold Voltage Vgs Typ=-800mV, Voltage Vds Typ=-20V, Voltage Vgs th Max=-1.5V, Current Id Max=2.4A, Datasheet URL=https://www.fairchildsemi.com/datasheets/FD/FDN304P.pdf, Datasheet Version="Rev. C, 01/2001", External Depth=2.5mm, External Length / Height=1.12mm, External Width=3.05mm, Full Power Rating Temperature=25°C, Manufacturer URL=https://www.fairchildsemi.com/, Mounting Technology=SurfaceMount, No. of Pins=3, Package URL=https://www.fairchildsemi.com/package-drawings/MA/MA03B.pdf, Reel Quantity=3000, SMD Marking=304P, SVHC=NoSVHC(19-Dec-2012), Tape Width=8mm, Termination Type=SMD, Transistor Case Style=SOT-23, Transistor Polarity=PChannel, Voltage Vds=20V, Voltage Vgs Max=-800mV, Voltage Vgs Rds on Measurement=-4.5V
Q2 Q3 Q4 Q5 Q6 Q7 Q8: library part CMP-0434-00001-1, "N-channel 60 V, 1.8 Ohm, 0.35 A STripFET(TM) II Power MOSFET, SOT23", Manufacturer=STMicroelectronics, ComponentLink1Description="Manufacturer URL", ComponentLink1URL=http://www.st.com/, ComponentLink2Description=Datasheet, ComponentLink2URL=http://www.st.com/st-web-ui/static/active/en/resource/technical/document/datasheet/CD00005134.pdf, DatasheetVersion="Rev. 9, 11/2008", Mounting Technology="Surface Mount", PackageDescription="3-Pin SOT23, 3.016 x 2.8 mm Body, 0.95 mm Pitch", PackageReference=SOT-23, PartNumber=2N7002
R1 R6 R7 R8: library part RNCS0603BKE10K0, "RES 10K OHM 0.1% 1/16W 0603", Device Package="0603 (1608 Metric)", Manufacturer="Stackpole Electronics Inc", Operating Temperature="-55°C ~ 155°C", Power (Watts)="0.063W, 1/16W", Ratings=AEC-Q200, Supplier Device Package=0603, Supplier Part Number 1=RNCS0603BKE10K0CT-ND, Temperature Coefficient=±25ppm/°C, Tolerance=±0.1%, ComponentLink1Description=Datasheet, ComponentLink1URL=https://www.seielect.com/catalog/sei-rncs_rnch.pdf, ComponentLink2Description="DigiKey Link", ComponentLink2URL=http://digikey.com/product-detail/en/stackpole-electronics-inc/RNCS0603BKE10K0/RNCS0603BKE10K0CT-ND/1800113, Composition="Thin Film", Features="Anti-Corrosive, Automotive AEC-Q200, Moisture Resistant", Height - Seated (Max)="0.022\" (0.55mm)", LastUpdated="2020/9/2 1:10:25", Lifecycle Status=Active, Minimum Order=1, Number of Terminations=2, Package / Case="0603 (1608 Metric)", Packaging=TapeAndReel, Part Number=RNCS0603BKE10K0, Part Status=Active, PartId=4838, Price=0.08, Series=RNCS, Size / Dimension="0.061\" L x 0.031\" W (1.55mm x 0.80mm)", Supplier 1=DigiKey
  R1 R7 R8: Resistance="10 kOhms"
  R6: Resistance="1 kOhms"
R2 R3 R4 R9 R10 R11: library part RNCS0603BKE10K0, "RES 10K OHM 0.1% 1/16W 0603", Device Package="0603 (1608 Metric)", Manufacturer="Stackpole Electronics Inc", Operating Temperature="-55°C ~ 155°C", Power (Watts)="0.063W, 1/16W", Ratings=AEC-Q200, Resistance="10 kOhms", Supplier Device Package=0603, Supplier Part Number 1=RNCS0603BKE10K0CT-ND, Temperature Coefficient=±25ppm/°C, Tolerance=±0.1%, ComponentLink1Description=Datasheet, ComponentLink1URL=https://www.seielect.com/catalog/sei-rncs_rnch.pdf, ComponentLink2Description="DigiKey Link", ComponentLink2URL=http://digikey.com/product-detail/en/stackpole-electronics-inc/RNCS0603BKE10K0/RNCS0603BKE10K0CT-ND/1800113, Composition="Thin Film", Features="Anti-Corrosive, Automotive AEC-Q200, Moisture Resistant", Height - Seated (Max)="0.022\" (0.55mm)", LastUpdated="2020/9/2 1:10:25", Lifecycle Status=Active, Minimum Order=1, Number of Terminations=2, Package / Case="0603 (1608 Metric)", Packaging=TapeAndReel, Part Number=RNCS0603BKE10K0, Part Status=Active, PartId=4838, Price=0.08, Series=RNCS, Size / Dimension="0.061\" L x 0.031\" W (1.55mm x 0.80mm)", Supplier 1=DigiKey
R5: library part B59641A0145A062, "THERMISTOR PTC 470 OHM 50% 0603", Device Package="0603 (1608 Metric)", Manufacturer="TDK Electronics Inc.", Operating Temperature="-40°C ~ 125°C", Resistance @ 25°C="470 Ohms", Resistance Tolerance=±50%, Supplier Device Package=0603, Supplier Part Number 1=495-4309-1-ND, ComponentLink1Description=Datasheet, ComponentLink1URL=https://www.tdk-electronics.tdk.com/inf/55/db/PTC/PTC_Sensors_SMD_chips_superior.pdf, ComponentLink2Description="DigiKey Link", ComponentLink2URL=http://digikey.com/product-detail/en/tdk-electronics-inc/B59641A0145A062/495-4309-1-ND/2273341, LastUpdated="2020/9/2 1:30:58", Lifecycle Status=Active, Minimum Order=1, Mounting Type="Surface Mount", Package / Case="0603 (1608 Metric)", Packaging=TapeAndReel, Part Number=B59641A0145A062, Part Status=Active, Price=0.18, Series="Automotive, AEC-Q200, B59641", Supplier 1=DigiKey
R12 R13 R14 R15 R16 R17 R18: library part SDR03EZPF62R0, "RES SMD 62 OHM 1% 0.3W 0603", Device Package="0603 (1608 Metric)", Manufacturer="Rohm Semiconductor", Operating Temperature="-55°C ~ 155°C", Power (Watts)=0.3W, Supplier Device Package=0603, Supplier Part Number 1=511-1725-1-ND, Temperature Coefficient=±100ppm/°C, Tolerance=±1%, ComponentLink1Description=Datasheet, ComponentLink1URL=https://www.rohm.com/datasheet/SDR03EZPF/sdr-e, ComponentLink2Description="DigiKey Link", ComponentLink2URL=http://digikey.com/product-detail/en/rohm-semiconductor/SDR03EZPF62R0/511-1725-1-ND/9675076, Composition="Thick Film", Features="Pulse Withstanding", Height - Seated (Max)="0.022\" (0.55mm)", LastUpdated="2020/9/2 1:10:24", Lifecycle Status=Active, Minimum Order=1, Number of Terminations=2, Package / Case="0603 (1608 Metric)", Packaging=TapeAndReel, Part Number=SDR03EZPF62R0, Part Status=Active, PartId=5389, Price=0.01, Resistance="62 Ohms", Series=SDR03, Size / Dimension="0.063\" L x 0.031\" W (1.60mm x 0.80mm)", Supplier 1=DigiKey
R19 R20 R21 R22 R23 R24 R25: library part CPF0603B220RE1, "RES SMD 220 OHM 0.1% 1/16W 0603", Device Package="0603 (1608 Metric)", Manufacturer="TE Connectivity Passive Product", Operating Temperature="-55°C ~ 155°C", Power (Watts)="0.063W, 1/16W", Supplier Device Package=0603, Supplier Part Number 1=A103065CT-ND, Temperature Coefficient=±25ppm/°C, Tolerance=±0.1%, ComponentLink1Description=Datasheet, ComponentLink1URL=https://www.te.com/commerce/DocumentDelivery/DDEController?Action=srchrtrv&DocNm=1773200&DocType=DS&DocLang=English, ComponentLink2Description="DigiKey Link", ComponentLink2URL=http://digikey.com/product-detail/en/te-connectivity-passive-product/CPF0603B220RE1/A103065CT-ND/2728616, Composition="Thin Film", Height - Seated (Max)="0.022\" (0.55mm)", LastUpdated="2020/9/2 1:10:23", Lifecycle Status=Active, Minimum Order=1, Number of Terminations=2, Package / Case="0603 (1608 Metric)", Packaging=TapeAndReel, Part Number=CPF0603B220RE1, Part Status=Active, PartId=5753, Price=0.12, Resistance="220 Ohms", Series="CPF, Neohm", Size / Dimension="0.061\" L x 0.031\" W (1.55mm x 0.80mm)", Supplier 1=DigiKey
R26: library part AC0603FR-071KL, "RES SMD 1K OHM 1% 1/10W 0603", Device Package="0603 (1608 Metric)", Manufacturer=Yageo, Operating Temperature="-55°C ~ 155°C", Power (Watts)="0.1W, 1/10W", Ratings=AEC-Q200, Supplier Device Package=0603, Supplier Part Number 1=311-1KLDCT-ND, Temperature Coefficient=±100ppm/°C, Tolerance=±1%, ComponentLink1Description=Datasheet, ComponentLink1URL=https://www.yageo.com/upload/media/product/productsearch/datasheet/rchip/PYu-AC_51_RoHS_L_7.pdf, ComponentLink2Description="DigiKey Link", ComponentLink2URL=http://digikey.com/product-detail/en/yageo/AC0603FR-071KL/311-1KLDCT-ND/2828140, Composition="Thick Film", Features="Automotive AEC-Q200, Moisture Resistant", Height - Seated (Max)="0.022\" (0.55mm)", LastUpdated="2020/9/2 1:09:58", Lifecycle Status=Active, Minimum Order=1, Number of Terminations=2, Package / Case="0603 (1608 Metric)", Packaging=CutTape, Part Number=AC0603FR-071KL, Part Status=Active, PartId=17353, Price=0.10, Resistance="1 kOhms", Series=AC, Size / Dimension="0.063\" L x 0.031\" W (1.60mm x 0.80mm)", Supplier 1=DigiKey
R27: library part AC0603FR-07100RL, "RES SMD 100 OHM 1% 1/10W 0603", Device Package="0603 (1608 Metric)", Manufacturer=Yageo, Operating Temperature="-55°C ~ 155°C", Power (Watts)="0.1W, 1/10W", Ratings=AEC-Q200, Supplier Device Package=0603, Supplier Part Number 1=YAG3561CT-ND, Temperature Coefficient=±100ppm/°C, Tolerance=±1%, ComponentLink1Description=Datasheet, ComponentLink1URL=https://www.yageo.com/upload/media/product/productsearch/datasheet/rchip/PYu-AC_51_RoHS_L_7.pdf, ComponentLink2Description="DigiKey Link", ComponentLink2URL=http://digikey.com/product-detail/en/yageo/AC0603FR-07100RL/YAG3561CT-ND/6006410, Composition="Thick Film", Features="Automotive AEC-Q200, Moisture Resistant", Height - Seated (Max)="0.022\" (0.55mm)", LastUpdated="2020/9/2 1:09:58", Lifecycle Status=Active, Minimum Order=1, Number of Terminations=2, Package / Case="0603 (1608 Metric)", Packaging=CutTape, Part Number=AC0603FR-07100RL, Part Status=Active, PartId=17348, Price=0.10, Resistance="100 Ohms", Series=AC, Size / Dimension="0.063\" L x 0.031\" W (1.60mm x 0.80mm)", Supplier 1=DigiKey
U1: library part CMP-0133-00083-1, "Stand-Alone Linear Li-Ion/Li-Polymer Charge Management Controller with Power-Good Output, 4.2V, 10-Pin DFN, Industrial Temperature, Tape and Reel", DatasheetVersion="revB, May-2009", PackageDescription="10-Lead Plastic Dual Flat, No Lead Package (MF) - 3x3x0.9mm Body [DFN]", PackageReference=DFN-MF10, PackageVersion="revBB, Aug-2009"
U2: library part CMP-0345-00001-2, "Buck-Boost Voltage Converter with 1.8 to 5.5 V Input and 1.2 to 5.5 V Output, -40 to 85 degC, 10-Pin SON (DRC), Green (RoHS & no Sb/Br)", Dynamic Voltage Scaling=TRUE, Manufacturer="Texas Instruments", Switching Frequency(Max)(kHz)=1500, ComponentLink1Description=Datasheet, ComponentLink1URL=http://www.ti.com/general/docs/lit/getliterature.tsp?genericPartNumber=TPS63000&fileType=pdf, ComponentLink2Description="Package Specification", ComponentLink2URL=http://www.ti.com/litv/pdf/mpds117k, DatasheetVersion=SLVS520B, Eco-Plan="Green (RoHS & no Sb/Br)", Iout(Max)(A)=1.2, Iq(Typ)(mA)=0.04, Mounting Technology="Surface Mount", PackageDescription="10-Pin Plastic Small Outline No-Lead, 3 x 3 x 1 mm Body, 0.5 mm Pitch, Exposed Pad", PackageReference=DRC0010J, PackageVersion="revL, Sep-2011", PartNumber=TPS63000DRCR, Regulated Outputs(#)=1, SubFamily="Buck-Boost Regulator", Synchronous Rectification=TRUE, Topology=Buck-Boost, Vin(Max)(V)=5.5, Vin(Min)(V)=1.8, Vout(Max)(V)=5.5, Vout(Min)(V)=1.2
U3: "锂电池保护IC"

## Free pads (board coordinates)
  rrect50% 3.048x2.032 hole 1.016: 2(23.444,25.248) 3(34.62,29.286)
  rrect50% 2.54x2.54 hole 1.778: 4(49.708,31.75)

## Via types
v1: diameter 0.381, hole 0.254, Top Layer to Bottom Layer, 16 vias
v2: diameter 1.016, hole 0.762, Top Layer to Bottom Layer, 6 vias
v3: diameter 0.5, hole 0.254, Top Layer to Bottom Layer, 5 vias
v4: diameter 1.524, hole 1.016, Top Layer to Bottom Layer, 4 vias
v5: diameter 0.5, hole 0.254, Top Layer to Bottom Layer, tented top, 4 vias
v6: diameter 0.635, hole 0.508, Top Layer to Bottom Layer, 2 vias

## Nets (pads, with @x,y where several pads share a name; then routed paths per layer and width w, separated by ;. In a path a pad name is that pad's centre, name@x,y a point inside that pad or via, vN(x,y) a via of type N, cw(c..) or ccw(c..) an arc to the next point about the centre after c; other vN are vias at no path point)
3V3_OUT: C3.2 C4.1 K2.1 K3.2 LED1.2 LED2.2 LED3.2 LED4.2 LED5.2 LED6.2 LED7.2 MD1.2 R1.2 R7.2 | length 262.9
  Top Layer w0.254: R7.2@38.913,15.581 38.938,15.555 R1.2@40.818,15.555
  Top Layer w1.016: LED7.2@21.686,57.307 LED7.2 ; LED6.2 49.473,65.669 50.636,65.669
  Top Layer w1.143: LED7.2@21.686,57.307 19.021,57.307 ccw(c42.291,33.274) 50.636,65.669
  Top Layer w1.524: 9.373,31.931 LED1.2 ; 22.15,7.062 LED2.2 ; LED3.2 50.739,1.396 ; K3.2 K3.2@53.053,46.355 ; LED5.2 70.883,49.113 ; LED4.2 72.616,20.416
  Bottom Layer w0.254: K2.1 34.595,20.853 v1(39.878,15.57)
  Bottom Layer w1.778: K2.1 42.38,30.315 ; LED3.2 42.38,11.188 42.38,30.315 ; K3.2 52.984,40.919 42.38,30.315
BAT+: K1.2 pad.3 Q1.3 R27.1 | length 13.6
  Top Layer w1.016: K1.2 K1.2@32.048,32.392
  Top Layer w1.524: v4(36.697,38.814) Q1.3@36.697,41.213
  Bottom Layer w1.524: K1.2 31.971,32.537 32.657,31.852 34.874,31.852 36.697,33.674 v4(36.697,38.814)
BAT-: C10.1 pad.2 U3.3 U3.6 | length 2.9
  Top Layer w1.524: pad.2 23.541,25.345 24.913,25.345 25.895,26.327
DCDC_IN: C8.2 F1.2 R9.1 U2.5 | length 25.1
  Top Layer w0.254: v1(37.135,45.847) 38.263,45.847 R9.1
  Top Layer w1.524: v4(34.417,34.265) F1.2 ; v4@35.992,49.53 40.056,49.53 C8.2@40.284,49.301
  Bottom Layer w0.254: 34.696,45.847 v1(37.135,45.847)
  Bottom Layer w1.524: v4(34.417,34.265) 34.696,34.544 34.696,45.847 34.696,48.108 v4(35.992,49.403)
EN: C6.2 EN.2 K2.5 MD1.3 R7.1 | length 62
  Top Layer w0.254: K2.5 29.161,17.804 34.061,17.804 35.907,17.804 36.831,16.88 C6.2 ; C6.2 R7.1@38.913,16.881
  Top Layer w0.762: K2.5 27.254,25.349 33.985,25.349 37.236,28.6 37.236,37.427 38.887,39.078 38.887,39.903 40.488,41.504 53.218,41.504 54.49,40.231 54.49,39.261 MD1.3
GND: C1.1 C2.1 C3.1 C4.2 C5.2 C6.1 C7.2 C8.1 C9.2 EN.1 IO0.1 J1.5 J1.6 J1.7 J1.8 J1.9 J1.10 J1.11 K2.6 MD1.1 MD1.15 MD1.38 MD1.39 pad.4 Q2.2 Q3.2 Q4.2 Q5.2 Q6.2 Q7.2 Q8.2 R5.1 R6.1 R8.2 R11.2 R26.1 U1.5 U1.11 U2.3 U2.9 U2.11 U3.2 | length 140.6
  Top Layer w0.254: EN.1@34.468,13.411 EN.1 ; EN.1@34.569,14.326 EN.1 ; C6.1 v1(36.881,14.046) 36.846,14.046 36.618,13.818 EN.1 ; C5.2 43.001,15.57 v1(44.143,14.429) 44.754,13.818 IO0.1 ; v3(43.985,47.652) U2.11@44.485,47.152 ; R11.2@44.485,43.928 R11.2
  Top Layer w0.305: v3(43.985,47.652) U2.3 U2.3@43.985,49.403 ; R11.2@44.485,43.928 U2.9 U2.11@44.485,47.152
  Top Layer w0.762: 21.387,27.534 23.51,27.534 R26.1@23.564,27.588 ; MD1.39@47.764,33.527 MD1.39@47.764,33.867
  Top Layer w0.889: MD1.15 45.224,36.407 cw(c45.224,33.867) MD1.39@47.764,33.867 ; MD1.39@49.599,31.692 MD1.39@51.434,29.857 ; MD1.39@51.212,29.629 51.403,29.82 54.28,29.82 cw(c54.28,27) 57.099,27 MD1.38 ; MD1.39@51.434,33.527 54.559,33.527 ccw(c54.559,36.067) 57.099,36.067 MD1.1
  Top Layer w1.016: v2(18.466,30.023) 18.476,30.033 Q2.2 ; 21.387,42.151 25.743,42.151 ; 21.565,35.052 23.281,33.335 R6.1 ; v5(26.355,38.837) 25.933,39.258 25.933,40.411 25.389,40.956 25.389,41.797 25.743,42.151 ; C1.1 25.984,42.393 25.743,42.151 ; Q3.2 29.644,13.36 v2(29.693,13.36) ; C9.2 C8.1@40.157,47.371 ; 45.517,47.6 46.598,46.518 48.605,46.518 C7.2 ; Q4.2 50.65,11.432 v2(50.673,11.455) ; Q7.2 58.623,59.748 v2(58.623,59.741) ; v2(61.595,47.041) 61.609,47.041 Q6.2 ; Q5.2 v2(69.494,31.623)
  Top Layer w1.524: J1.11 J1.10 J1.9 J1.8 36.445,66.383 J1.6 ; J1.7 31.615,61.197 32.453,62.035 ; 34.417,46.279 34.417,46.478 35.31,47.371 v4(37.465,47.371) 40.157,47.371 42.335,47.371
  Top Layer w2.032: 21.387,27.534 20.955,28.143 20.955,47.371 23.368,49.784 26.949,49.784 31.615,54.45 31.615,61.197
  other v3: 43.235,47.152 44.735,47.152 43.235,48.152 44.735,48.152
  other v5: 27.305,38.337 28.255,38.837 27.305,39.337
IO0: C5.1 IO0.2 K2.4 MD1.25 R1.1 | length 37.7
  Top Layer w0.254: MD1.25 40.582,22.2 38.532,22.2 36.322,24.409 28.854,24.409 K2.4 27.266,22.238 27.266,21.298 29.765,18.8 39.255,18.8 41.135,16.92 C5.1 43.001,16.92 43.91,17.829 IO0.2@46.101,17.829
IO18: MD1.30 R19.2 R20.2 R21.2 R22.2 R23.2 R24.2 R25.2 | length 194.3
  Top Layer w0.254: R19.2 15.139,32.847 13.462,31.17 13.462,27.407 23.622,17.247 27.711,17.247 33.858,11.1 32.385,9.627 26.797,9.627 25.707,10.717 25.707,12.299 R20.2 ; R25.2 24.914,54.433 v1(25.603,54.991) ; MD1.30 MD1.30@46.985,22.238 ; 47.955,12.929 48.006,12.878 48.006,10.805 48.865,9.947 48.865,7.821 R21.2 ; v1(55.575,55.956) 55.592,55.973 55.592,57.49 R24.2 ; R23.2 66.253,46.32 66.323,46.197 v1(66.853,45.11) ; v1@71.195,26.466 v1(71.171,26.441) 71.695,27.54 71.941,27.742 R22.2
  Top Layer w0.762: 33.858,11.1 46.126,11.1 47.955,12.929 v6(47.955,18.593) ; MD1.30@46.985,22.238 v6(46.985,24.165)
  Bottom Layer w0.254: v1(25.603,54.991) 51.841,54.991 57.023,49.809 ; v6@46.961,24.189 v6(46.985,24.165) ; v6@47.955,18.491 66.167,18.491 71.171,23.495 v1(71.171,26.441) ; v1(55.575,55.956) 57.023,54.508 57.023,49.809 ; v1(66.853,45.11) 62.052,45.11 57.023,40.081 57.023,49.809
  Bottom Layer w0.762: v6@46.961,24.189 57.023,34.251 57.023,40.081 ; v6(46.985,24.165) 46.985,22.738 47.955,21.768 v6(47.955,18.593)
NetC7_1: C7.1 K3.1 R10.1 U2.1 | length 7.9
  Top Layer w0.254: C7.1 49.023,49.073 50.292,49.073 50.902,48.463 50.902,45.212 50.308,44.619 49.806,44.619 49.027,43.84 R10.1
NetC9_1: C9.1 R9.2 U2.6 U2.7 U2.8 | length 5.6
  Top Layer w0.254: R9.2 38.292,44.548 C9.1 41.64,44.548 42.985,45.892 U2.6
NetC10_2: C10.2 R27.2 U3.5
NetD1_2: D1.2 F1.1 Q1.2 | length 4.4
  Top Layer w1.524: D1.2 34.384,39.116 ; Q1.2 34.384,39.116 ; F1.1 34.384,38.559 34.384,39.116
NetL1_1: L1.1 U2.4 | length 0.9
  Top Layer w0.305: 43.396,50.038 43.485,49.949 U2.4
NetL1_2: L1.2 U2.2 | length 1.4
  Top Layer w0.305: U2.2 44.485,50.53 44.501,50.546
NetLED1_1: LED1.1 R12.2 | length 4.3
  Top Layer w1.016: LED1.1@10.744,35.052 14.524,35.052 R12.2
NetLED2_1: LED2.1 R13.2 | length 4.5
  Top Layer w1.016: LED2.1 21.409,10.194 22.957,11.743 22.957,12.87 R13.2
NetLED3_1: LED3.1 R14.2 | length 4.9
  Top Layer w1.016: R14.2 46.244,4.278 LED3.1
NetLED4_1: LED4.1 R15.2 | length 7
  Top Layer w1.016: LED4.1 69.938,18.875 68.961,19.852 68.961,21.04 R15.2
NetLED5_1: LED5.1 R16.2 | length 4.5
  Top Layer w1.016: R16.2 68.513,43.447 LED5.1
NetLED6_1: LED6.1 R17.2 | length 6.8
  Top Layer w1.016: LED6.1 50.694,59.367 51.938,58.123 R17.2
NetLED7_1: LED7.1 R18.2 | length 4.4
  Top Layer w1.016: LED7.1 26.553,56.081 R18.2 R18.2@26.694,55.825
NetPG1_2: PG1.2 R2.2 | length 2
  Top Layer w0.254: R2.2 PG1.2
NetQ2_1: Q2.1 R19.1 | length 1.5
  Top Layer w1.016: R19.1 15.271,31.465 Q2.1@16.627,31.465
NetQ2_3: Q2.3 R12.1 | length 2
  Top Layer w1.016: R12.1 17.577,34.061 Q2.3@17.577,33.965
NetQ3_1: Q3.1 R20.1 | length 1.5
  Top Layer w1.016: R20.1 26.777,11.524 Q3.1
NetQ3_3: Q3.3 R13.1 | length 1.7
  Top Layer w1.016: R13.1@24.643,14.766 Q3.3
NetQ4_1: Q4.1 R21.1 | length 1.5
  Top Layer w1.016: Q4.1 50.155,8.121 R21.1
NetQ4_3: Q4.3 R14.1 | length 2.3
  Top Layer w1.016: R14.1 45.944,8.155 Q4.3@47.139,10.068
NetQ5_1: Q5.1 R22.1 | length 1.5
  Top Layer w1.016: Q5.1 71.241,29.527 R22.1
NetQ5_3: Q5.3 R15.1 | length 2.5
  Top Layer w1.016: Q5.3 69.075,27.347 R15.1
NetQ6_1: Q6.1 R23.1 | length 1.7
  Top Layer w1.016: Q6.1 65.574,47.701 R23.1
NetQ6_3: Q6.3 R16.1 | length 2.8
  Top Layer w1.016: Q6.3 64.842,43.478 R16.1
NetQ7_1: Q7.1 R24.1 | length 1.7
  Top Layer w1.016: R24.1 57.248,58.853 Q7.1
NetQ7_3: Q7.3 R17.1 | length 2.6
  Top Layer w1.016: R17.1 54.426,60.462 Q7.3
NetQ8_1: Q8.1 R25.1 | length 1.6
  Top Layer w1.016: R25.1 23.682,53.062 Q8.1
NetQ8_3: Q8.3 R18.1 | length 2.5
  Top Layer w1.016: 26.57,52.584 27.19,53.085 R18.1
NetR2_1: R2.1 U1.7 | length 15
  Top Layer w0.254: v1(23.825,47.371) R2.1 ; v1(26.298,36.283) 26.323,36.308 26.529,36.308 26.822,36.601 26.822,37.269 U1.7
  Bottom Layer w0.254: v1(23.825,47.371) 23.419,46.965 23.419,39.163 v1(26.298,36.283)
NetR3_1: R3.1 U1.4 | length 8.2
  Top Layer w0.254: v1(24.028,45.695) 25.044,45.695 R3.1 ; v1(26.391,41.377) 26.391,41.351 26.782,40.96 26.782,40.41 U1.4
  Bottom Layer w0.254: v1(24.028,45.695) 24.028,42.494 25.146,41.377 v1(26.391,41.377)
NetR3_2: R3.2 S1.2 | length 2
  Top Layer w0.254: R3.2 S1.2
NetR4_1: R4.1 U1.3 | length 5
  Top Layer w0.254: v1(25.044,43.028) 25.044,44.044 R4.1 R4.1@25.095,44.044 ; v1(27.292,41.351) 27.299,41.345 27.299,40.393 U1.3
  Bottom Layer w0.254: v1(25.044,43.028) 25.883,42.189 26.454,42.189 v1(27.292,41.351)
NetR4_2: R4.2 S2.2 | length 2
  Top Layer w0.254: R4.2 S2.2
NetR5_2: R5.2 U1.8 | length 5.7
  Top Layer w0.254: v1(27.292,36.297) 27.299,36.303 27.299,37.28 U1.8 ; R5.2 28.767,33.223 29.047,33.503 v1(29.047,33.858)
  Bottom Layer w0.254: v1(27.292,36.297) 29.047,34.542 v1(29.047,33.858)
NetR6_2: R6.2 U1.6 | length 3.7
  Top Layer w0.254: R6.2 24.689,36.271 25.704,37.287 U1.6
NetR10_2: R10.2 R11.1 U2.10 | length 4.6
  Top Layer w0.254: U2.10 44.985,45.892 45.898,44.979 R11.1 47.701,43.815 R10.2
NetR26_2: R26.2 U3.1
RXD0: K2.2 MD1.34 | length 22.7
  Top Layer w0.254: K2.2 34.366,20.218 51.638,20.218 52.019,20.599 MD1.34
TXD0: K2.3 MD1.35 | length 27.2
  Top Layer w0.254: K2.3 32.461,19.583 52.578,19.583 53.289,20.295 MD1.35
USB_5V: C1.2 D1.1 J1.1 PG1.1 Q1.1 R8.1 S1.1 S2.1 U1.1 U1.2 | length 29.8
  Top Layer w1.524: 28.778,42.266 29.87,43.358 29.87,48.336 ; S2.1@29.947,44.196 D1.1 34.366,42.266 R8.1@34.366,44.145 ; 35.72,61.697 35.72,62.07
  Top Layer w2.032: 29.87,48.336 35.337,53.803 35.337,61.314 35.72,61.697
VBAT: C2.2 K1.1 U1.9 U1.10 | length 3.3
  Top Layer w1.524: 28.651,35.077 K1.1
pads on no net: J1.2 J1.3 J1.4 MD1.4 MD1.5 MD1.6 MD1.7 MD1.8 MD1.9 MD1.10 MD1.11 MD1.12 MD1.13 MD1.14 MD1.16 MD1.17 MD1.18 MD1.19 MD1.20 MD1.21 MD1.22 MD1.23 MD1.24 MD1.26 MD1.27 MD1.28 MD1.29 MD1.31 MD1.32 MD1.33 MD1.36 MD1.37 U3.4

## Polygon pours and split planes (outlines as drawn)
GND on Bottom Layer "GND_L02_P000" (solid, remove dead copper, pour order 0): 1.575,74.981 1.575,-6.706 86.919,-6.706 86.919,75.057

## Keep-outs
Keep-Out Layer:
  circle w0.254: c42.266,33.579 r35

## Other copper
Top Layer:
  rectangle net GND: 47.092,29.185 52.095,34.214
  rectangle net USB_5V: 34.341,57.988 36.881,59.893
  rectangle net GND: 30.099,57.988 32.639,59.893
  rectangle net BAT+: 31.217,28.473 32.918,33.477
  rectangle net BAT+: 31.445,28.473 35.662,30.277
  rectangle net GND: 30.683,61.646 32.842,65.837
  rectangle net NetC7_1: 47.879,48.006 53.848,49.911
  rectangle net 3V3_OUT: 52.045,44.171 56.236,47.32
  rectangle net GND: 56.642,38.202 58.014,45.11
  rectangle net 3V3_OUT: 55.347,38.202 56.286,45.11
  rectangle net BAT-: 26.264,26.162 27.483,29.312
  rectangle net BAT-: 24.917,26.391 27.457,27.102
  rectangle net GND: 23.063,27.356 25.883,28.067
  rectangle net NetR26_2: 23.139,28.423 25.857,29.007
  rectangle net NetC10_2: 27.737,27.356 32.36,28.042
  rectangle net BAT-: 26.746,28.423 30.658,29.312
  rectangle net NetL1_2: 44.323,50.292 48.463,56.49
  rectangle net GND: 39.675,47.066 45.885,48.235
  rectangle net NetC9_1: 42.85,45.669 44.12,46.558
  rectangle net DCDC_IN: 39.649,48.666 42.985,49.606
  rectangle net VBAT: 27.661,34.569 28.88,37.668
  rectangle net USB_5V: 27.661,39.98 28.829,42.901
  region net NetL1_1: 43.358,49.505 43.358,50.038 42.958,50.038
  region net USB_5V: 35.204,62.611 35.204,63.195 35.357,63.195 35.357,62.611
  region net USB_5V: 35.611,63.017 35.89,62.738 35.611,62.738 35.382,62.967
  region net NetC7_1: 44.985,49.557 45.364,49.936 48.082,49.936 48.082,48.717 44.985,48.717
  region net NetL1_1: 40.297,56.464 43.663,56.464 43.663,49.809 41.764,49.809 40.297,51.714
  region net NetL1_2: 44.628,49.581 44.628,50.673 45.693,50.673
  region net NetL1_1: 43.612,49.517 43.663,49.809 43.485,49.949
  region net GND: 24.206,33.757 24.206,32.715 27.178,32.715 27.178,35.687 26.06,35.687 26.06,33.757
Bottom Layer:
  rectangle net GND: 48.057,30.175 51.308,33.376
  rectangle net GND: 20.726,21.336 23.114,23.647
  rectangle net GND: 36.246,46.685 38.684,48.006
  rectangle net GND: 35.281,62.611 37.643,64.846
  rectangle net GND: 30.531,61.443 32.69,63.5

## Silkscreen, mask and mechanical layers (free items; w line width, h text height)
Top Overlay:
  text "GND" at 21.514,20.803 h0.76 r270
  text "EN" at 24.028,20.803 h0.76 r270
  text "IO0" at 26.594,20.803 h0.76 r270
  text "TXD0" at 29.21,20.803 h0.76 r270
  text "RXD0" at 31.598,20.803 h0.76 r270
  text "3V3" at 34.239,20.803 h0.76 r270
  text "ESP32_AC_Controller" at 52.095,13.792 h0.76
Bottom Overlay:
  text "BAT+" at 39.649,28.956 h0.76
  text "BAT-" at 21.335,24.943 h0.76
Top Solder:
  rectangle: 34.112,57.937 36.906,59.969
  rectangle: 30.074,57.937 32.868,59.969
Mechanical 1:
  lines w0.254: 7.139,33.579 cw(c42.266,33.579) 42.266,68.706 cw(c42.266,33.579) 77.393,33.579 cw(c42.266,33.579) 42.266,-1.548 cw(c42.266,33.579) 7.139,33.579

## Text inside footprints (layer, text, board x,y; h text height)
J1: Mechanical 1 "PCB EDGE" at 39.884,69.104 h0.3 r195
LED2: Mechanical 15 "K" at 20.255,11.441 h0.76 r141.5
LED4: Mechanical 15 "K" at 68.829,17.276 h0.76 r244.5
LED5: Mechanical 15 "K" at 71.58,44.312 h0.76 r296